# Altium PCB BaseStation.PcbDoc
Units mm, origin at the board's own origin, x right, y up, seen from the top; angles counter-clockwise.
Board outline 62.28 x 43.76 mm, 2 copper layers (Top Layer, Bottom Layer); 48 components, 32 nets, 155 pads, 30 vias.
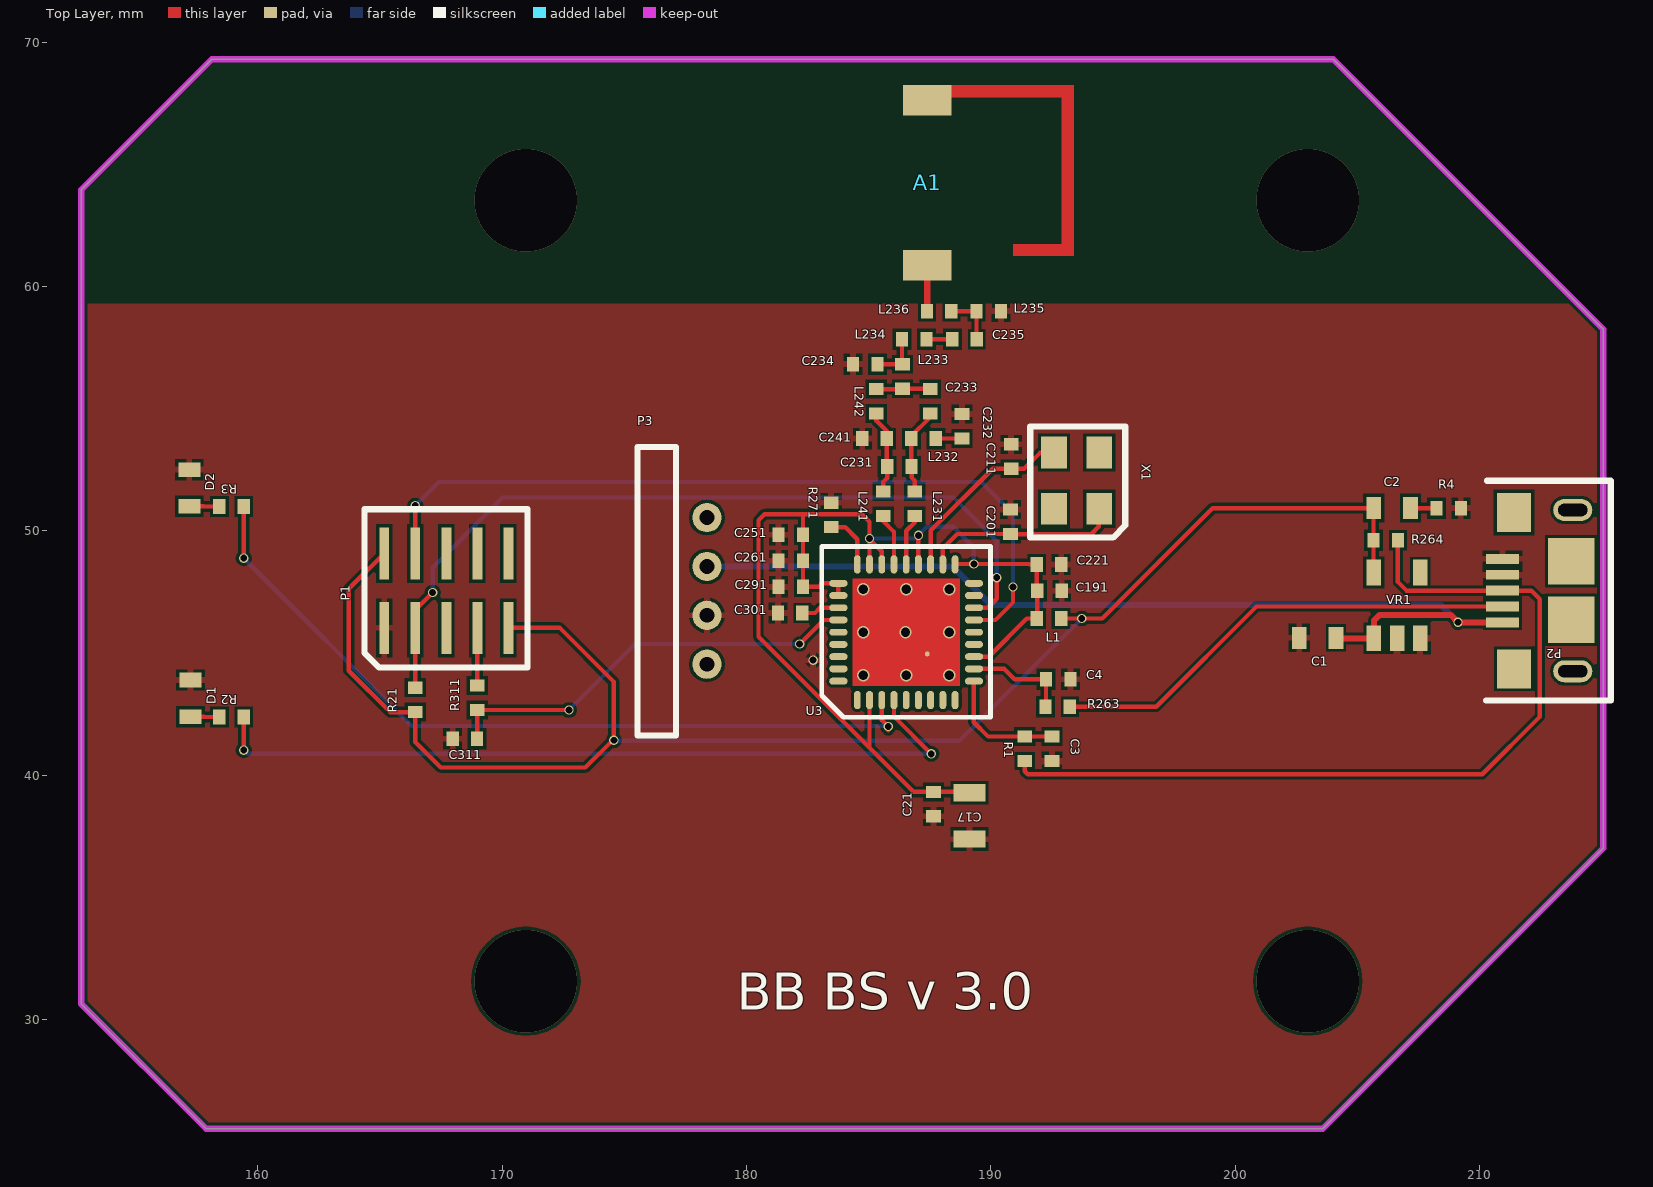
[diagram p0: Top Layer view]
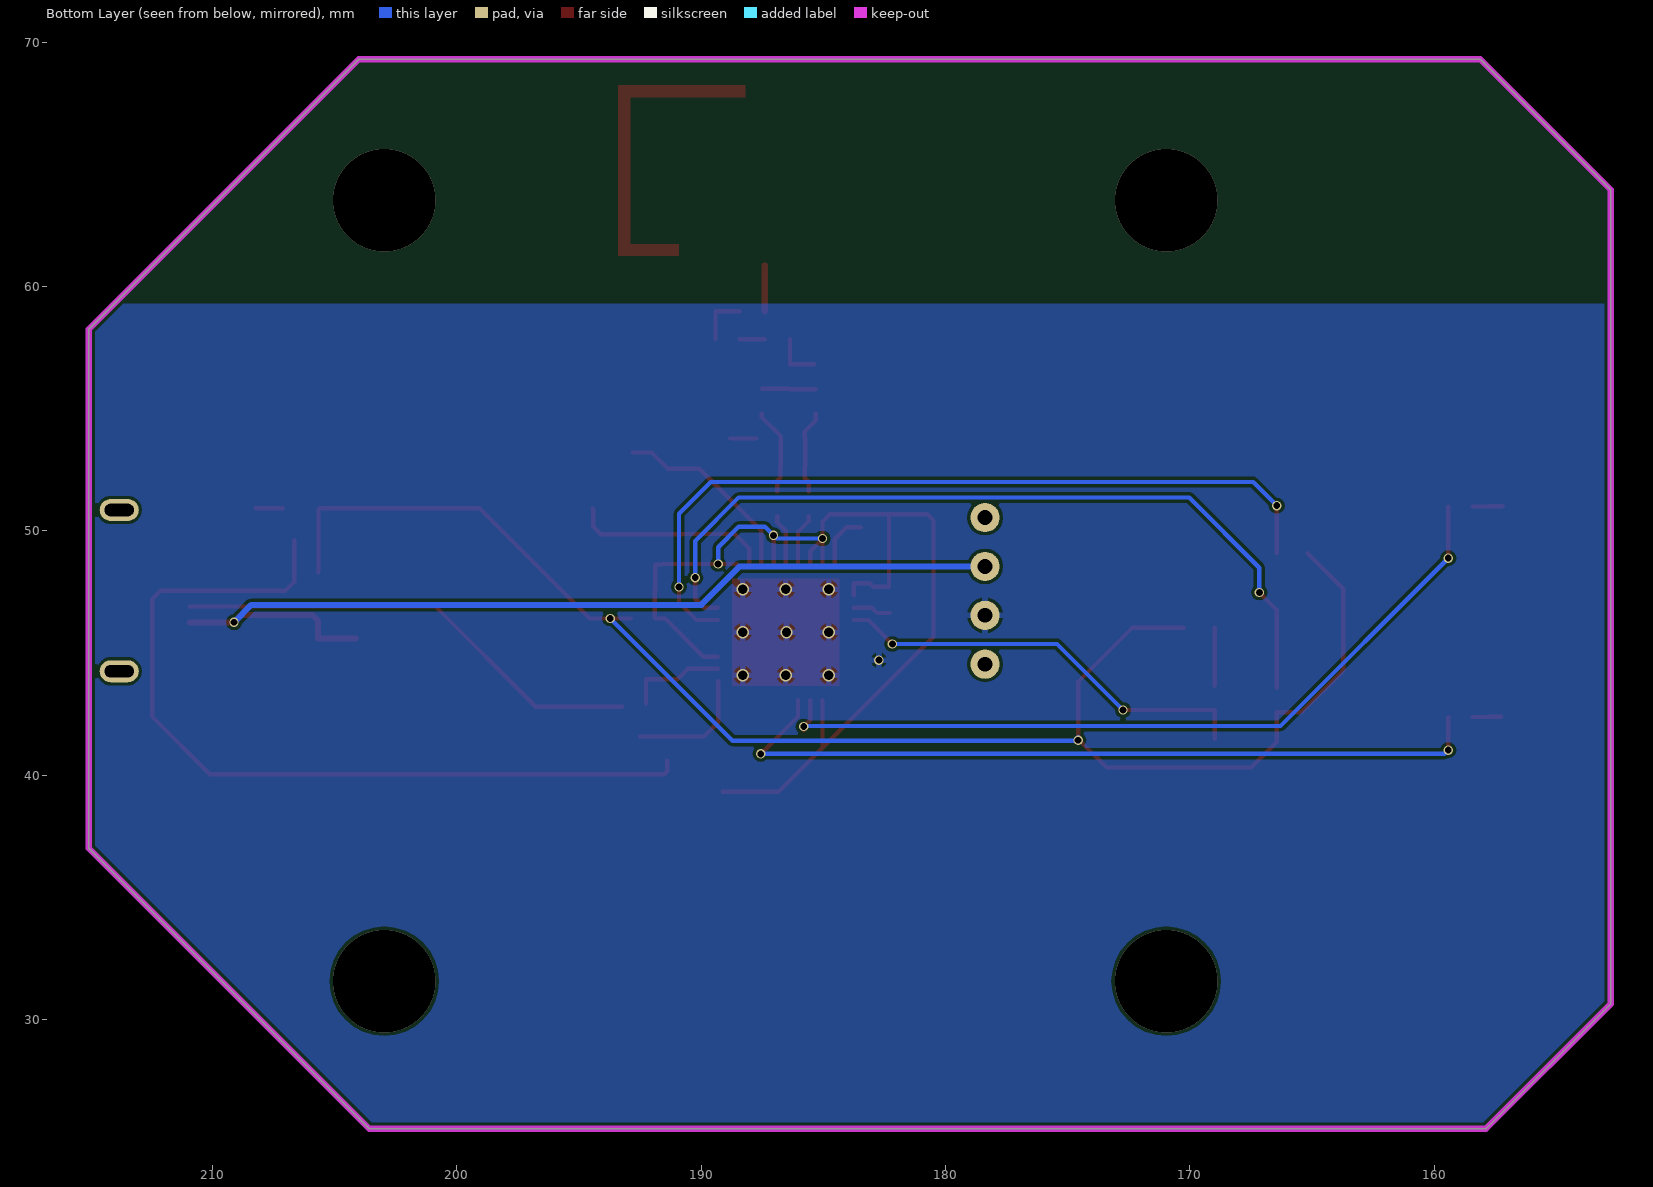
[diagram p1: Bottom Layer view, seen from below]

## Layer stack, top to bottom
Top Layer: signal copper 0.0356
Dielectric: dielectric 0.32, FR-4, Dk 4.8
Bottom Layer: signal copper 0.0356

## Board outline
152.781,30.632 157.886,25.527 203.581,25.527 215.062,37.008 215.062,58.242 204.013,69.291 158.115,69.291 152.781,63.957

## Design rules (kind name [scope] priority, off if disabled: settings)
Clearance [All] p1: gap=0.127
HoleSize [All] p1: absolutevalues=TRUE maxlimit=5.08 minlimit=0.279 maxpercent=80.000 minpercent=20.000
HoleToHoleClearance [All] p1: gap=0.203 allowstackedmicrovias=TRUE
MinimumSolderMaskSliver [All] p1: minsoldermaskwidth=0
PlaneClearance [All] p1: clearance=0.381
PolygonConnect [All] p1: connectstyle=Relief reliefconductorwidth=0.254 reliefentries=4 polygonreliefangle="90 Angle"
RoutingVias [All] p1: holewidth=0.152 width=0.254 viastyle="Through Hole" minholewidth=0.152 minwidth=0.254 maxholewidth=0.711 maxwidth=1.27
SilkToSilkClearance [All] p1: silktosilkclearance=0.051
SilkscreenOverComponentPads [All] p1: minsilkscreentomaskgap=0.076
SolderMaskExpansion [All] p1: expansion=0.102
Width [All] p1: maxlimit=1.27 minlimit=0.127 preferedwidth=0.178
22 further rules are at their usual default settings.

## Classes and differential pairs
component class BaseStationCPU: C17 C21 C191 C201 C211 C221 C251 C261 C291 C301 C311 D1 D2 D3 L1 R2 R3 R11 R12 R13 R14 R15 R16 R17 R18 R19 R21 R271 R311 TH1 TH2 U3 X1
component class RF: A1 C231 C232 C233 C234 C235 C241 L231 L232 L233 L234 L235 L236 L241 L242
component class USB: C1 C2 C3 C4 P2 P3 R1 R4 R262 R263 R264 Text VR1

## Components (designator, comment, footprint, x,y, rotation, side; value= is the part's Value field where it differs from the comment)
A1 "900 MHz Antenna" 0915AT43A0026 187.401,64.11 r90 top
C1 "Cap" C_0603 203.378,45.618 r180 top
C2 "Cap" C_0603 206.426,50.927 r0 top
C3 "Cap" C_0402 192.507,41.08 r90 top
C4 "Cap" C_0402 192.761,43.917 r180 top
C17 "Cap" C_0805 189.128,38.329 r90 top
C21 "Cap" C_0402 187.655,38.811 r90 top
C191 "Cap" C_0402 192.405,47.549 r180 top
C201 "Cap" C_0402 190.805,50.368 r270 top
C211 "Cap" C_0402 190.83,53.035 r270 top
C221 "Cap" C_0402 192.38,48.616 r180 top
C231 "Cap" C_0402 186.258,52.629 r0 top
C232 "Cap" C_0402 188.824,54.28 r90 top
C233 "Cap" C_0402 187.528,55.296 r90 top
C234 "Cap" C_0402 184.861,56.82 r0 top
C235 "Cap" C_0402 188.925,57.836 r0 top
C241 "Cap" C_0402 185.242,53.772 r0 top
C251 "Cap" C_0402 181.813,49.835 r0 top
C261 "Cap" C_0402 181.813,48.768 r0 top
C291 "Cap" C_0402 181.813,47.701 r0 top
C301 "Cap" C_0402 181.788,46.634 r180 top
C311 "Cap" C_0402 168.478,41.486 r0 top
D1 "LED_EL19-21SYGC" R_0603 157.251,43.141 r90 top
D2 "LED_EL19-21SYGC" R_0603 157.201,51.752 r90 top
L1 "Inductor" R_0402 192.38,46.406 r0 top
L231 "Inductor" R_0402 186.893,51.105 r90 top
L232 "Inductor" R_0402 187.249,53.772 r0 top
L233 "Inductor" R_0402 186.385,56.312 r90 top
L234 "Inductor" R_0402 186.868,57.836 r0 top
L235 "Inductor" R_0402 189.916,58.979 r180 top
L236 "Inductor" R_0402 187.884,58.979 r180 top
L241 "Inductor" R_0402 185.598,51.105 r90 top
L242 "Inductor" R_0402 185.318,55.296 r90 top
P1 "Header 5X2" "SMD HEADER" 165.176,49.073 r0 top
P2 "mini USB female connector" MICROUSB10118193 210.947,47.549 r90 top
P3 "5V output" "Charger Board Connector Female" 178.384,48.235 r270 top
R1 "Res2" R_0402 191.389,41.08 r270 top
R2 "Res2" R_0402 158.928,42.379 r0 top
R3 "Res2" R_0402 158.928,50.99 r0 top
R4 "Res2" R_0402 208.737,50.927 r180 top
R21 "Res2" R_0402 166.446,43.078 r270 top
R263 "Res2" R_0402 192.735,42.799 r180 top
R264 "Res2" R_0402 206.16,49.606 r0 top
R271 "Res2" R_0402 183.464,50.648 r270 top
R311 "Res2" R_0402 168.986,43.163 r270 top
U3 "CC1111" TI_QFP36 184.531,43.078 r90 top
VR1 "TPS76933" TPS76933 205.677,45.593 r0 top
X1 "X_48.000/20/35/20/18" CX3225GB48000D0HEQZ1 193.472,52.045 r90 top

## Footprints (in the part's own frame and the unit in brackets; to place one, negate y for a bottom-side part, rotate by r counter-clockwise, add the part's x,y. Pads: shape width x height; smd on the part's side, far side on the other; paste and mask are expansions set on the pad)
0915AT43A0026 [mm]
  rect 1.25x2 smd: 1(-3.251,0) 2(3.499,0)
  Top Layer region: 3.624,-6 4.124,-6 4.124,-0.787 3.624,-0.787
  Top Layer region: -2.515,-6 3.759,-6 3.759,-5.5 -2.515,-5.5
  Top Layer region: -2.876,-6 -2.376,-6 -2.376,-3.5 -2.876,-3.5
C_0402 [mm]
  rect 0.5x0.6 smd: 1(-0.5,0) 2(0.5,0)
C_0603 [mm]
  rect 0.6x0.9 smd: 1(-0.75,0) 2(0.75,0)
C_0805 [mm]
  rect 0.7x1.3 smd: 1(-0.95,0) 2(0.95,0)
"Charger Board Connector Female" [mm]
  round 1.2 hole 0.6: 1(-2.304,0) 2(-0.304,0) 3(1.696,0) 4(3.696,0)
  silkscreen extent -5.19,-2.84 6.61,-1.26
CX3225GB48000D0HEQZ1 [mm] "48MHz Crystal"
  rect 1.3x1.05 smd: 1(-1.143,-0.965) 2(1.157,0.885) ""(-1.143,0.885) ""(1.157,-0.965)
  silkscreen extent -2.32,-2.03 2.23,1.85
MICROUSB10118193 [mm] "Micro-USB connector"
  rect 0.4x1.35 smd: 1(-1.3,0.005) 2(-0.65,0.005) 3(0,0.005) 4(0.65,0.005) 5(1.3,0.005)
  oval 0.9x1.6 hole 0.5 slot 1.2 at 90 deg: ""(-3.3,-2.87) ""(3.3,-2.87)
  rect 1.6x1.4 smd: ""(-3.2,-0.47) ""(3.2,-0.47)
  rect 1.9x1.9 smd: ""(-1.2,-2.806) ""(1.2,-2.806)
  silkscreen extent -4.5,-4.42 4.5,0.69
R_0402 [mm]
  rect 0.5x0.6 smd: 1(-0.5,0) 2(0.5,0)
R_0603 [mm]
  rect 0.6x0.9 smd: 1(-0.75,0) 2(0.75,0)
"SMD HEADER" [mil]
  rect 16x84 smd: 1(0,-120) 2(0,0) 3(50,-120) 4(50,0) 5(100,-120) 6(100,0) 7(150,-120) 8(150,0) 9(200,-120) 10(200,0)
  silkscreen extent -32,-184 231,71
TI_QFP36 [mm]
  oval 0.75x0.28 smd mask+0.051: 1(-0.006,-0.007) 2(-0.006,-0.507) 3(-0.006,-1.007) 4(-0.006,-1.507) 5(-0.006,-2.007) 6(-0.006,-2.507) 7(-0.006,-3.007) 8(-0.006,-3.507) 9(-0.006,-4.007) 19(5.544,-4.007) 20(5.544,-3.507) 21(5.544,-3.007) 22(5.544,-2.507) 23(5.544,-2.007) 24(5.544,-1.507) 25(5.544,-1.007) 26(5.544,-0.507) 27(5.544,-0.007)
  oval 0.28x0.75 smd mask+0.051: 10(0.769,-4.782) 11(1.269,-4.782) 12(1.769,-4.782) 13(2.269,-4.782) 14(2.769,-4.782) 15(3.269,-4.782) 16(3.769,-4.782) 17(4.269,-4.782) 18(4.769,-4.782) 28(4.769,0.768) 29(4.269,0.768) 30(3.769,0.768) 31(3.269,0.768) 32(2.769,0.768) 33(2.269,0.768) 34(1.769,0.768) 35(1.269,0.768) 36(0.769,0.768)
  round 0.2 smd: 37(1.88,-2.87)
  Top Layer region: 0.569,-4.207 4.969,-4.207 4.969,0.193 0.569,0.193
  silkscreen extent -0.71,-5.46 6.27,1.45
TPS76933 [mm] "IC REG LDO 3.3V .1A SOT-23-5"
  rect 0.6x1.05 smd mask+0.07: 1(0,0) 2(0.95,0) 3(1.9,0) 4(1.9,2.7) 5(0,2.7)

## Part data
A1: library part 0915AT43A0026E, "RF CHIP ANTENNA 902 - 928MHZ"
C1 C2 C3 C4 C17 C21 C191 C201 C211 C221 C231 C232 C233 C234 C235 C241 C251 C261 C291 C301 C311: "Capacitor"
D1: library part LED2, "LED ALINGAP YW/GN CLEAR 0603 SMD"
D2: library part LED2, "LED 660NM RED WTR CLR 0603 SMD"
P1: "Header, 5-Pin, Dual row"
P2: library part "Header 6", "USB connector"
P3: library part "Header 2", "5V output to charge BrewBit"
R1 R2 R3 R4 R21 R263 R264 R271 R311: "Resistor"
U3: "RF Microcontrollers (MCU) True System-on-Chip"
VR1: "IC REG LDO 3.3V .1A SOT-23-5"
X1: library part XTAL, "Crystal Oscillator"

## Via types
v1: diameter 0.381, hole 0.279, Top Layer to Bottom Layer, 17 vias
v2: diameter 0.5, hole 0.381, Top Layer to Bottom Layer, tented top, 9 vias
v3: diameter 4.2, hole 4.2, Top Layer to Bottom Layer, 4 vias

## Nets (pads, with @x,y where several pads share a name; then routed paths per layer and width w, separated by ;. In a path a pad name is that pad's centre, name@x,y a point inside that pad or via, vN(x,y) a via of type N, cw(c..) or ccw(c..) an arc to the next point about the centre after c; other vN are vias at no path point)
3V3: C2.1 L1.2 P1.2 P1.9 R21.2 R264.1 VR1.5 | length 65.2
  Top Layer w0.178: P1.2 163.728,47.625 163.728,44.272 165.422,42.578 R21.2 166.446,41.351 167.488,40.31 173.406,40.31 174.574,41.478 174.574,43.815 172.364,46.025 P1.9 ; L1.2 v1(193.722,46.406) 194.564,46.406 199.085,50.927 205.613,50.927 205.66,50.88 R264.1 205.66,48.31 VR1.5
  Bottom Layer w0.178: v1@174.574,41.554 174.727,41.402 188.718,41.402 v1(193.722,46.406)
  other v1: 174.574,41.427
5V: C1.1 P2.1 P3.2 VR1.1 | length 39.4
  Top Layer w0.254: C1.1@204.128,45.593 VR1.1 205.677,46.318 205.916,46.556 208.816,46.556 v1(209.118,46.253) ; v1@209.123,46.249 P2.1
  Bottom Layer w0.254: P3.2 188.418,48.538 189.992,46.965 208.407,46.965 v1(209.118,46.253)
DC: P1.3 R21.1 U3.16 | length 33.7
  Top Layer w0.178: R21.1 P1.3 166.446,46.761 v1(167.157,47.473) ; U3.16 189.874,46.847 190.246,47.219 v1(190.246,48.082)
  Bottom Layer w0.178: v1(167.157,47.473) 167.157,48.489 170.028,51.359 188.468,51.359 190.246,49.581 v1(190.246,48.082)
DD: P1.4 U3.15 | length 32.9
  Top Layer w0.178: P1.4 v1(166.446,51.029) ; U3.15 190.187,46.347 190.906,47.066 v1(190.906,47.701)
  Bottom Layer w0.178: v1(166.446,51.029) 167.411,51.994 189.611,51.994 190.906,50.698 v1(190.906,47.701)
GND: C1.2 C3.1 C4.1 C17.1 C21.1 C191.1 C201.1 C211.1 C221.1 C232.2 C234.1 C241.1 C251.1 C261.1 C291.1 C301.2 C311.1 D1.2 D2.2 L235.1 P1.1 P2.4 P2.5 P3.3 R4.1 R271.1 U3.37 VR1.2 VR1.3
  other v1: 182.728,44.704
  other v2: 184.778,44.087 186.538,44.087 188.298,44.087 184.778,45.847 186.512,45.847 188.298,45.847 184.778,47.607 186.538,47.607 188.298,47.607
NetA1_1: A1.1 L236.2 | length 1.9
  Top Layer w0.254: L236.2@187.401,58.979 A1.1
NetC2_2: C2.2 R4.2 | length 1.1
  Top Layer w0.178: C2.2@207.113,50.927 R4.2
NetC17_2: C17.2 C21.2 C191.2 C221.2 C251.2 C261.2 C291.2 L1.1 U3.2 U3.12 U3.19 U3.22 U3.25 U3.26 U3.28 U3.29 | length 46.1
  Top Layer w0.178: 182.321,50.673 184.734,50.673 185.038,50.37 v1@185.038,49.658 ; U3.29 U3.28 183.102,47.847 182.956,47.701 C291.2 C261.2 C251.2 182.313,50.673 180.74,50.673 180.492,50.426 180.492,45.661 186.842,39.311 C21.2 C17.2@189.128,39.311 ; 185.038,41.123 U3.2 ; U3.26 v1@185.038,49.658 ; U3.25 185.538,49.158 v1@185.038,49.658 ; U3.22 v1(187.038,49.809) ; U3.19@188.538,48.637 191.562,48.637 191.584,48.616 C221.2 C191.2@191.88,47.574 ; U3.12 189.916,44.847 191.475,46.406 L1.1 ; L1.1@191.905,46.431 C191.2
  Bottom Layer w0.178: v1(185.039,49.682) 186.911,49.682 187.393,50.165 188.468,50.165 189.306,49.327 v1(189.306,48.637)
NetC231_1: C231.1 C241.2 L241.2 L242.1 | length 3.4
  Top Layer w0.178: L242.1 185.318,54.5 185.768,54.051 C241.2@185.768,53.772 ; L241.2 185.598,51.994 185.758,52.154 C231.1 ; C231.1@185.742,52.645 C241.2
NetC231_2: C231.2 C233.1 L231.2 L232.1 | length 3.6
  Top Layer w0.178: C231.2@186.749,52.638 L232.1 186.749,53.873 187.528,54.653 C233.1 ; C231.2 186.758,52.18 186.893,52.045 L231.2
NetC232_1: C232.1 L232.2 | length 1.1
  Top Layer w0.178: L232.2 C232.1@188.816,53.772
NetC233_2: C233.2 L233.1 L242.2 | length 2.2
  Top Layer w0.178: L242.2 L233.1@186.369,55.796 ; L233.1 C233.2@187.512,55.812
NetC234_2: C234.2 L233.2 L234.1 | length 2
  Top Layer w0.178: C234.2 L233.2@186.368,56.82 ; L233.2@186.368,56.804 L234.1
NetC235_1: C235.1 L234.2 | length 1
  Top Layer w0.178: L234.2@187.393,57.836 C235.1
NetC235_2: C235.2 L235.2 L236.1 | length 2.1
  Top Layer w0.178: L236.1@188.409,58.979 L235.2 C235.2@189.416,57.845
NetC301_1: C301.1 U3.30 | length 1.6
  Top Layer w0.178: C301.1 182.804,46.634 183.016,46.847 U3.30
NetC311_2: C311.2 R311.2 U3.31 | length 17.5
  Top Layer w0.178: C311.2 168.978,42.062 168.986,42.07 R311.2 v1(172.736,42.663) ; v1(182.177,45.364) 183.159,46.347 U3.31
  Bottom Layer w0.178: v1(172.736,42.663) 175.438,45.364 v1(182.177,45.364)
NetD1_1: D1.1 R2.1 | length 1.2
  Top Layer w0.178: D1.1 157.81,42.391 157.822,42.379 R2.1
NetD2_1: D2.1 R3.1 | length 1.2
  Top Layer w0.178: D2.1 157.785,51.002 157.797,50.99 R3.1
NetP2_2: P2.2 R263.1 | length 19.4
  Top Layer w0.178: R263.1 196.774,42.799 200.874,46.899 P2.2
NetP2_3: P2.3 R1.2 R264.2 | length 35.1
  Top Layer w0.178: R1.2 191.389,40.157 191.516,40.03 210.109,40.03 212.471,42.393 212.471,47.193 212.115,47.549 P2.3 207.01,47.549 206.66,47.899 R264.2
NetR2_2: R2.2 U3.4 | length 32.4
  Top Layer w0.178: v1(159.428,41.021) R2.2 ; U3.4 186.038,42.393 v1(187.562,40.869)
  Bottom Layer w0.178: v1(159.428,41.021) 159.58,40.869 v1(187.562,40.869)
NetR3_2: R3.2 U3.3 | length 32.5
  Top Layer w0.178: v1(159.428,48.878) R3.2 ; U3.3 185.538,42.25 v1(185.801,41.986) v1@185.801,41.834
  Bottom Layer w0.178: v1(159.428,48.878) 166.294,42.012 v1@185.649,42.012
NewNet1: A1.2
RBIAS: R271.2 U3.27 | length 2.3
  Top Layer w0.178: R271.2 184.04,50.148 184.538,49.65 U3.27
RF_N: L241.1 U3.24 | length 2.2
  Top Layer w0.178: L241.1 185.598,50.394 186.038,49.954 U3.24
RF_P: L231.1 U3.23 | length 2.1
  Top Layer w0.178: U3.23 186.538,49.996 186.893,50.352 L231.1
RSET: P1.7 R311.1 | length 2.4
  Top Layer w0.178: R311.1 P1.7
USB+: C3.2 R1.1 U3.10 | length 5.1
  Top Layer w0.178: U3.10 189.306,43.847 189.306,42.164 189.89,41.58 R1.1 C3.2
USB-: C4.2 R263.2 U3.11 | length 4.1
  Top Layer w0.178: U3.11 190.551,44.347 190.981,43.917 C4.2 R263.2@192.261,42.926
XOSC_Q1: C211.2 U3.21 X1.2 | length 8
  Top Layer w0.178: U3.21 187.538,49.997 190.076,52.535 C211.2 191.364,52.535 192.03,53.202 X1.2 X1.2@192.811,53.202
XOSC_Q2: C201.2 U3.20 X1.1 | length 8.1
  Top Layer w0.178: U3.20 188.038,49.277 188.628,49.868 C201.2 ; C201.2@190.805,49.86 194.107,49.86 194.412,50.165 194.412,50.876 X1.1
pads on no net: P1.5 P1.6 P1.8 P1.10 P2. P3.1 P3.4 U3.1 U3.5 U3.6 U3.7 U3.8 U3.9 U3.13 U3.14 U3.17 U3.18 U3.32 U3.33 U3.34 U3.35 U3.36 VR1.4 X1.
copper on no net:
  other v3: 170.971,31.566 202.971,31.566 170.971,63.531 202.971,63.531

## Polygon pours and split planes (outlines as drawn)
GND on Bottom Layer "GND Plane" (solid, remove dead copper, pour order 3): 150.724,59.157 150.851,59.284 217.018,59.284 217.018,24.128 216.713,23.825 216.205,24.33 150.216,24.33 150.216,58.955 150.546,59.284
GND on Top Layer "GND Plane" (solid, remove dead copper, pour order 2): 216.383,25.019 216.256,24.892 150.292,24.892 150.292,59.106 150.419,59.233 150.47,59.284 216.129,59.284 216.129,25.019

## Keep-outs
Keep-Out Layer:
  the board outline again, w0.254

## Silkscreen, mask and mechanical layers (free items; w line width, h text height)
Top Overlay:
  text "BB BS v 3.0" at 179.603,30.404 h1.52